# Altium PCB LED_Fret.PcbDoc
Units mm, origin at the board's own origin, x right, y up, seen from the top; angles counter-clockwise.
Board outline 152.4 x 101.6 mm, 2 copper layers (Top Layer, Bottom Layer); 6 components, 2 nets, 43 pads, 0 vias.
Unrouted connection lines stored in the file: 16.
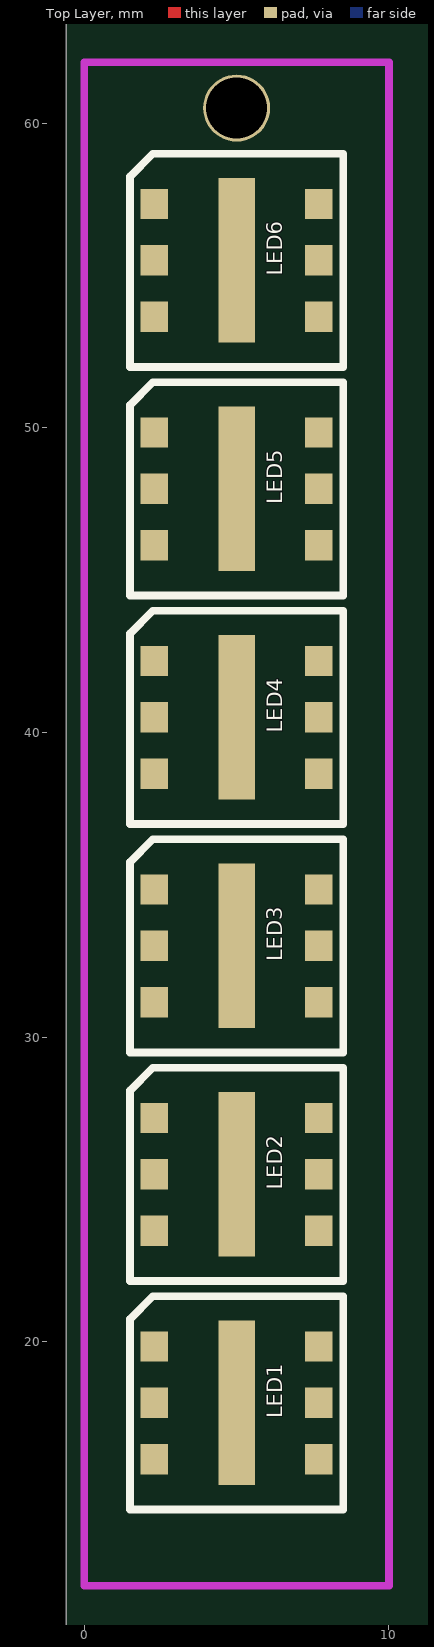
[diagram p0: Top Layer view]
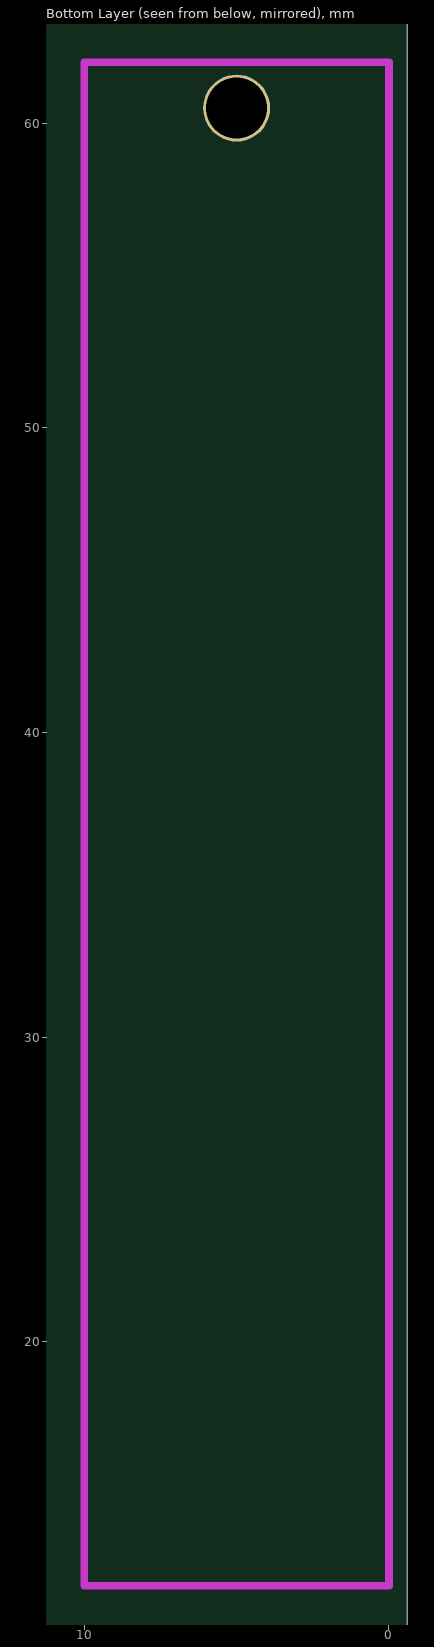
[diagram p1: Bottom Layer view, seen from below]

## Layer stack, top to bottom
Top Solder: solder mask 0.0102, Solder Resist, Dk 3.5
Top Layer: signal copper 0.0356
Dielectric 1: dielectric 0.32, FR-4, Dk 4.8
Bottom Layer: signal copper 0.0356
Bottom Solder: solder mask 0.0102, Solder Resist, Dk 3.5

## Board outline
-0.6,-0.6 151.8,-0.6 151.8,101 -0.6,101

## Design rules (kind name [scope] priority, off if disabled: settings)
Clearance [All] p1: gap=0.254 ignorepadtopadclearanceinfootprint=FALSE except(0: Arc-Hole Track-Hole SMDPad-Hole THPad-Hole Via-Hole Fill-Hole Poly-Hole Region-Hole Text-Hole)
PolygonConnect [All] p1: connectstyle=Relief reliefconductorwidth=0.254 reliefentries=4 polygonreliefangle="90 Angle" airgapwidth=0.254
RoutingVias [All] p1: holewidth=0.711 width=1.27 viastyle="Through Hole" minholewidth=0.711 minwidth=1.27 maxholewidth=0.711 maxwidth=1.27
SolderMaskExpansion [All] p1: expansion=0.102
Width [All] p1: maxlimit=0.254 minlimit=0.254 preferedwidth=0.254
30 further rules are at their usual default settings.

## Components (designator, comment, footprint, x,y, rotation, side; value= is the part's Value field where it differs from the comment)
LED1 "APA102C" "RGB LED" 2.5,15.5 r0 top
LED2 "APA102C" "RGB LED" 2.5,23 r0 top
LED3 "APA102C" "RGB LED" 2.5,30.5 r0 top
LED4 "APA102C" "RGB LED" 2.5,38 r0 top
LED5 "APA102C" "RGB LED" 2.5,45.5 r0 top
LED6 "APA102C" "RGB LED" 2.5,53 r0 top

## Footprints (in the part's own frame and the unit in brackets; to place one, negate y for a bottom-side part, rotate by r counter-clockwise, add the part's x,y. Pads: shape width x height; smd on the part's side, far side on the other; paste and mask are expansions set on the pad)
"RGB LED" [mm] "APA102C - 6-Pin SMT RGB LED"
  rect 0.9x1 smd: 0(-0.2,4.35) 1(-0.2,2.5) 2(-0.2,0.65) 3(5.2,4.35) 4(5.2,2.5) 5(5.2,0.65)
  rect 1.2x5.4 smd: GND(2.5,2.5)
  silkscreen extent -1,-1 6,6, body extent 0,0 5,5, height 1.4

## Part data
LED1 LED2 LED3 LED4 LED5 LED6: library part "RGB LED"

## Free pads (board coordinates)
  round 2.2 hole 2: M1(5,60.5)

## Nets (pads, with @x,y where several pads share a name; then routed paths per layer and width w, separated by ;. In a path a pad name is that pad's centre, name@x,y a point inside that pad or via, vN(x,y) a via of type N, cw(c..) or ccw(c..) an arc to the next point about the centre after c; other vN are vias at no path point)
GND: LED1.5 LED1.GND LED2.5 LED2.GND LED3.5 LED3.GND LED4.5 LED4.GND LED5.5 LED5.GND LED6.5 LED6.GND
VCC: LED1.2 LED2.2 LED3.2 LED4.2 LED5.2 LED6.2
pads on no net: LED1.0 LED1.1 LED1.3 LED1.4 LED2.0 LED2.1 LED2.3 LED2.4 LED3.0 LED3.1 LED3.3 LED3.4 LED4.0 LED4.1 LED4.3 LED4.4 LED5.0 LED5.1 LED5.3 LED5.4 LED6.0 LED6.1 LED6.3 LED6.4

## Keep-outs
Keep-Out Layer:
  lines w0.254: 0,12 10,12 10,62 0,62 0,12